# Altium PCB PCB1.PcbDoc
Units mil, origin at the board's own origin, x right, y up, seen from the top; angles counter-clockwise.
Board outline 3722.27 x 3722.27 mil, 2 copper layers (Top Layer, Bottom Layer); 10 components, 6 nets, 20 pads, 0 vias.
Unrouted connection lines stored in the file: 14.
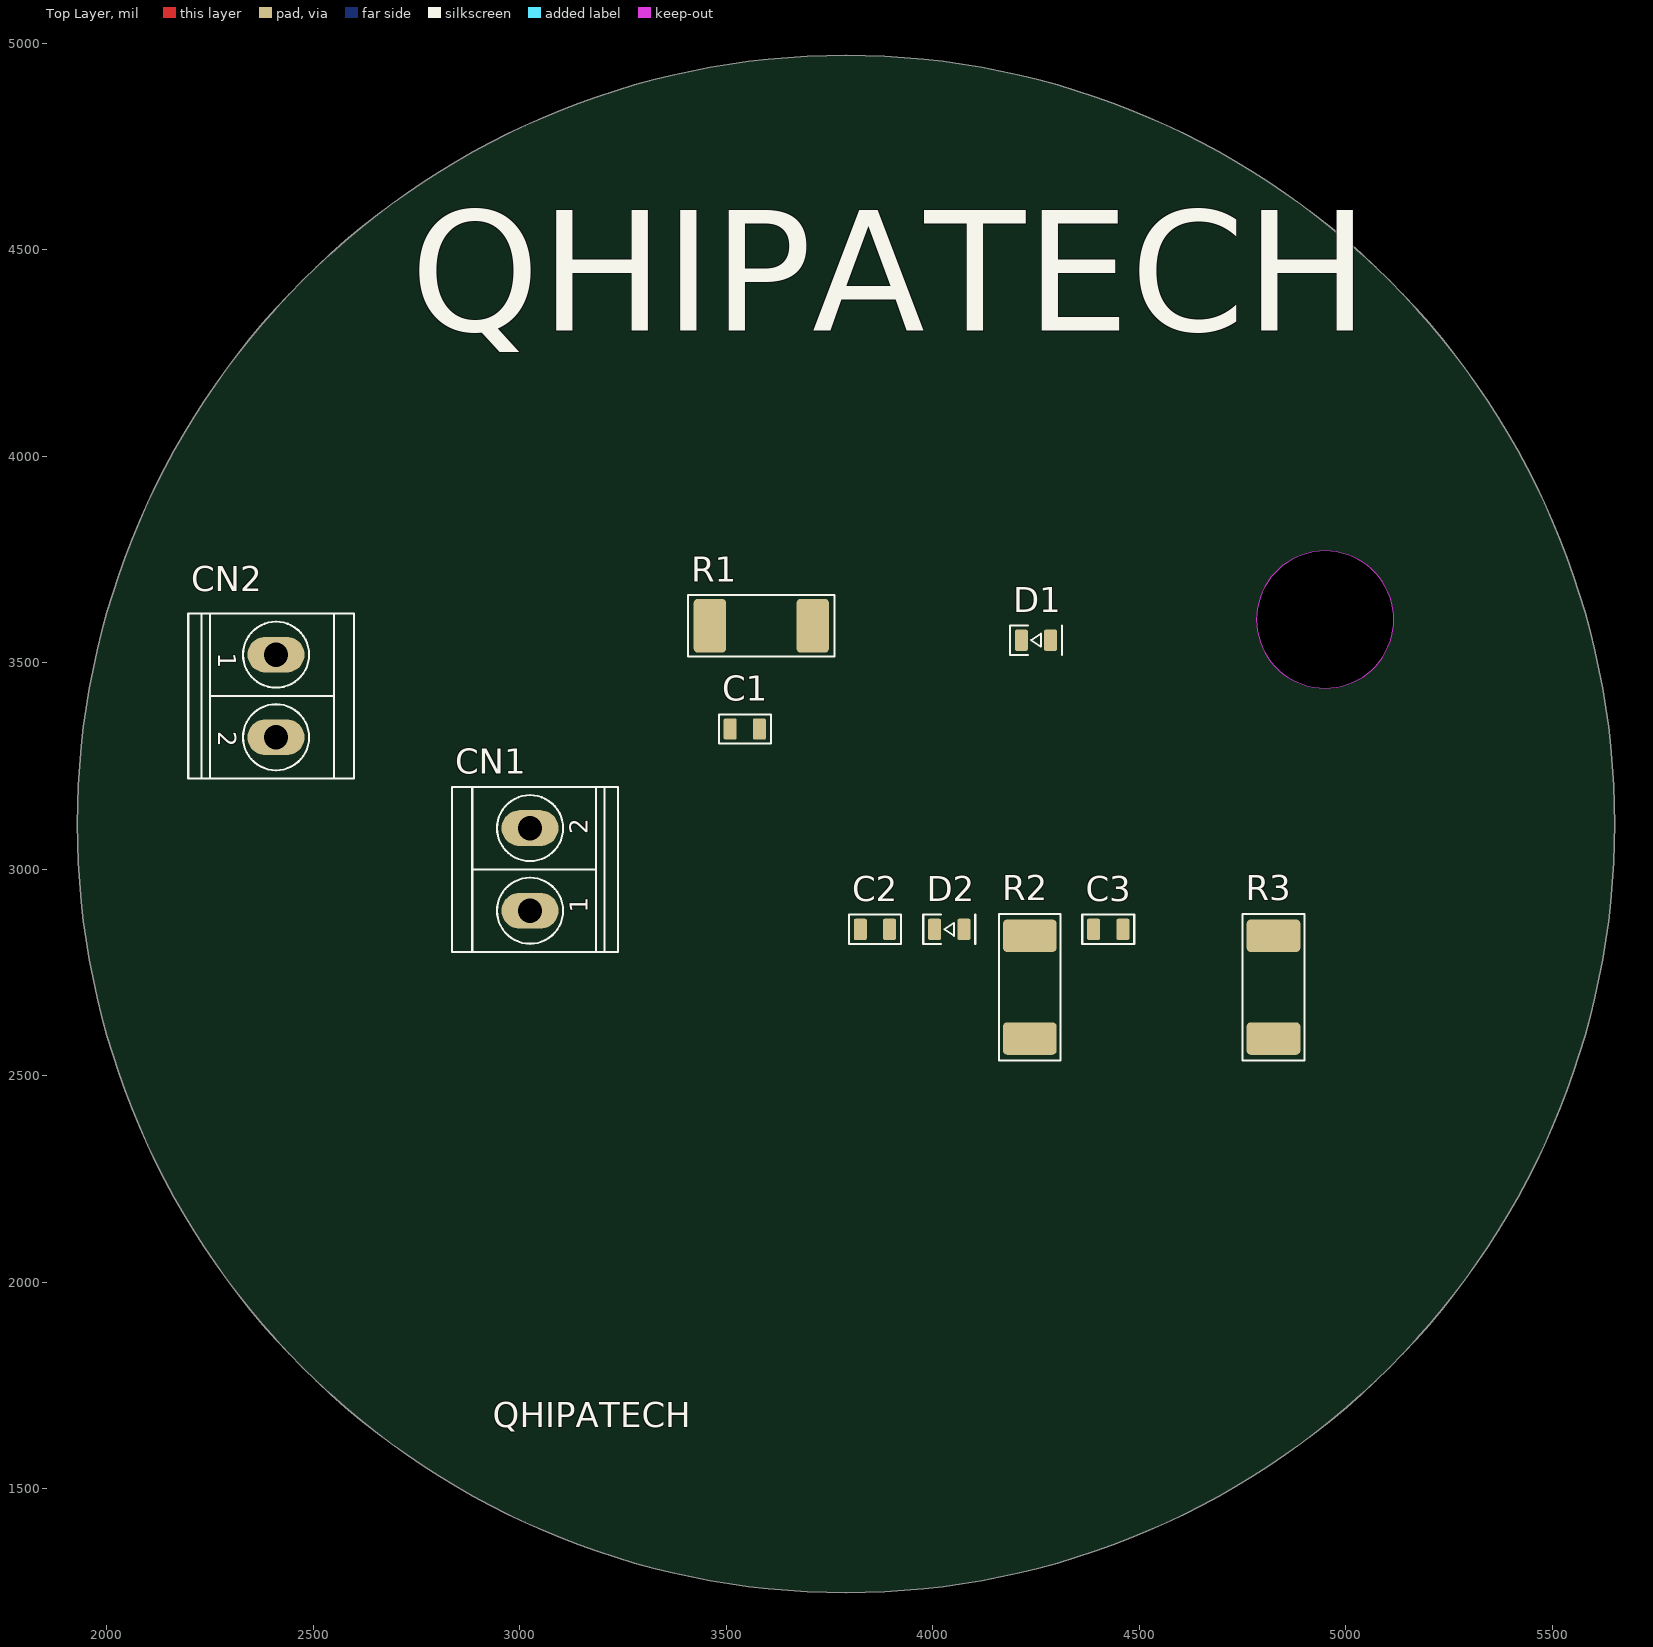
[diagram p0: Top Layer view]
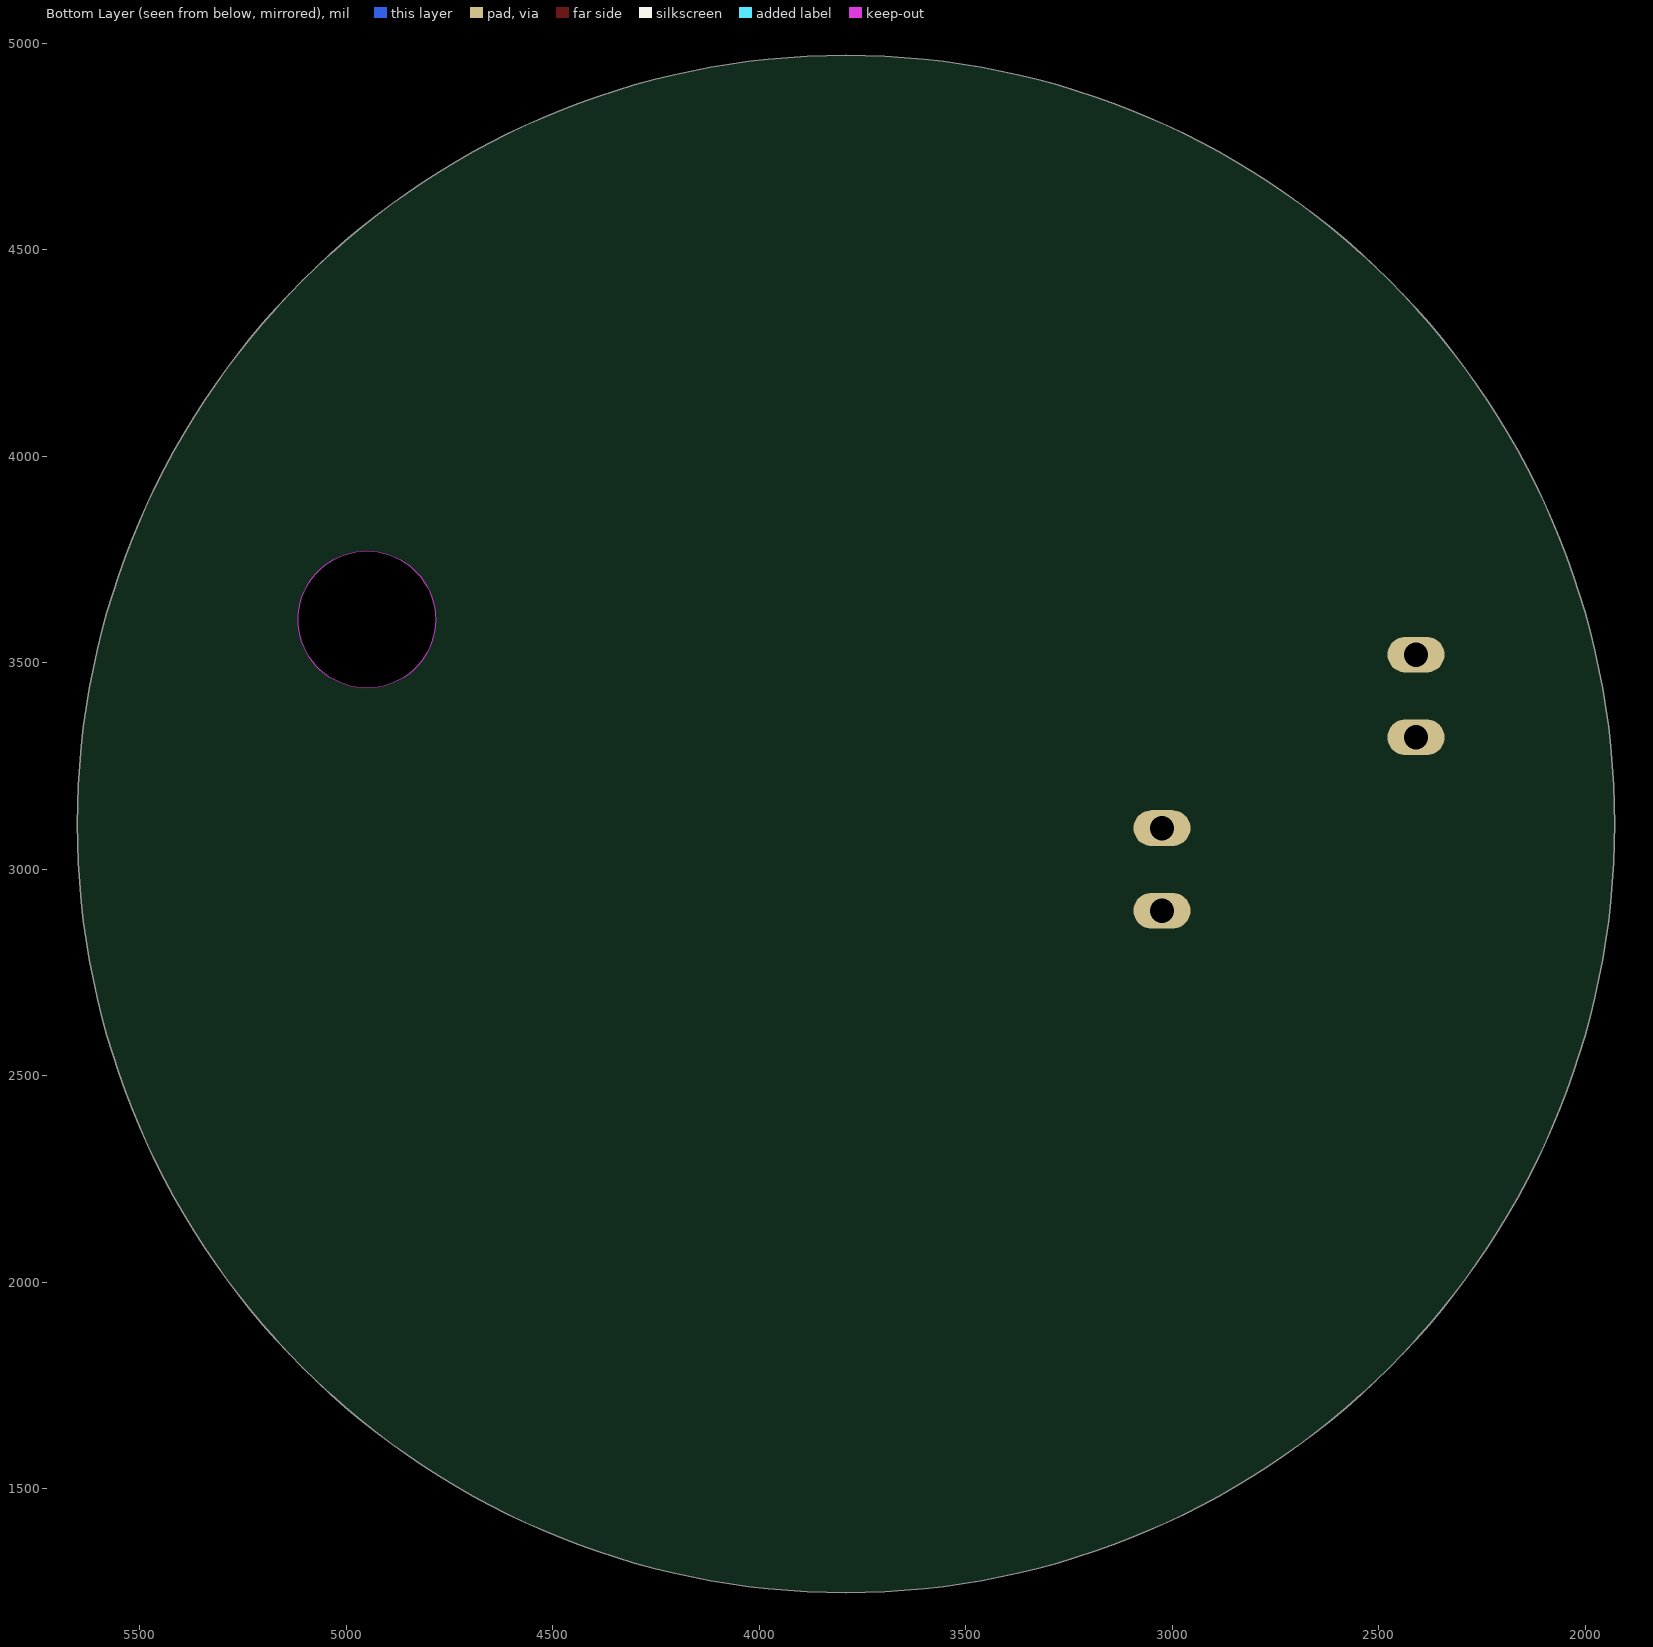
[diagram p1: Bottom Layer view, seen from below]

## Layer stack, top to bottom
Top Solder: solder mask 0.4, Solder Resist, Dk 3.5
Top Layer: signal copper 1.4
Dielectric 1: dielectric 12.6, FR-4, Dk 4.8
Bottom Layer: signal copper 1.4
Bottom Solder: solder mask 0.4, Solder Resist, Dk 3.5

## Board outline
1928.86,3110 ccw(c3790,3110) 3790,1248.86 ccw(c3790,3110) 5651.14,3110 ccw(c3790,3110) 3790,4971.14 ccw(c3790,3110)
cut-out: 4783.79,3605 ccw(c4950,3605) 4950,3438.79 ccw(c4950,3605) 5116.21,3605 ccw(c4950,3605) 4950,3771.21 ccw(c4950,3605)

## Design rules (kind name [scope] priority, off if disabled: settings)
Clearance [All] p1: gap=10 ignorepadtopadclearanceinfootprint=FALSE except(0: Arc-Hole Track-Hole SMDPad-Hole THPad-Hole Via-Hole Fill-Hole Poly-Hole Region-Hole Text-Hole)
PolygonConnect [All] p1: connectstyle=Relief reliefconductorwidth=10 reliefentries=4 polygonreliefangle="90 Angle" airgapwidth=10
RoutingVias [All] p1: holewidth=28 width=50 viastyle="Through Hole" minholewidth=28 minwidth=50 maxholewidth=28 maxwidth=50
SolderMaskExpansion [All] p1: expansion=4 istentingtop=FALSE
Width [All] p1: maxlimit=10 minlimit=10 preferedwidth=10
30 further rules are at their usual default settings.

## Components (designator, comment, footprint, x,y, rotation, side; value= is the part's Value field where it differs from the comment)
C1 "100nF" C0805 3545,3340 r180 top
C2 "100nF" C0805 3860,2855 r0 top
C3 "100nF" C0805 4425,2855 r0 top
CN1 "TB508-02" TB508-02 3025,3000 r90 top
CN2 "TB508-02" TB508-02 2410,3420 r270 top
D1 "LED" LED-0805 4250,3555 r0 top
D2 "LED" LED-0805 4040,2855 r0 top
R1 "1k0" R2512 3585,3590 r0 top
R2 "1k0" R2512 4235,2715 r90 top
R3 "1k0" R2512 4825,2715 r90 top

## Footprints (in the part's own frame and the unit in brackets; to place one, negate y for a bottom-side part, rotate by r counter-clockwise, add the part's x,y. Pads: shape width x height; smd on the part's side, far side on the other; paste and mask are expansions set on the pad)
C0805 [mm] "Ceramic capacitor 0805"
  rrect25% 0.8x1.3 smd: 1(-0.9,0) 2(0.9,0)
  silkscreen extent -1.6,-0.9 1.6,0.9, body extent -1,-0.62 1,0.63, height 0.8
LED-0805 [mm] "SMT LED DIODE 0805"
  rrect25% 0.8x1.3 smd: 1(-0.9,0) 2(0.9,0)
  silkscreen extent -1.6,-0.9 1.6,0.9, body extent -1.01,-0.62 1.01,0.63, height 1.1
R2512 [mm] "SMD RESISTOR 2512"
  rrect25% 2x3.3 smd: 1(-3.159,0) 2(3.16,0)
  silkscreen extent -4.5,-1.9 4.5,1.9, body extent -3.16,-1.6 3.16,1.6, height 0.62
TB508-02 [mm] "Vertical terminal block 0.2 inch (5.08mm) pitch"
  oval 2.2x3.5 hole 1.5: 1(-2.54,0) 2(2.54,0)
  silkscreen extent -5.08,-5.4 5.08,4.8, body extent -5.67,-4.75 5.06,4.75, height 15

## Part data
C1 C2 C3: library part Capacitor, "Capacitor without polarity", Voltage=25V
CN1 CN2: library part TB-02, "Terminal Block"
D1 D2: "LED - Light-Emitting Diode"
R1 R2 R3: library part Resistor, "Single resistor", Power=0.125W, Unit price=0.1

## Nets (pads, with @x,y where several pads share a name; then routed paths per layer and width w, separated by ;. In a path a pad name is that pad's centre, name@x,y a point inside that pad or via, vN(x,y) a via of type N, cw(c..) or ccw(c..) an arc to the next point about the centre after c; other vN are vias at no path point)
GND: C2.1 CN1.2 D1.1 D2.1 R2.1
NetC1_1: C1.1 C2.2 R3.1
NetC3_2: C3.2 R1.2 R3.2
PIN1: CN2.1 R1.1
PIN2: C1.2 CN2.2
VCC: C3.1 CN1.1 D1.2 D2.2 R2.2

## Silkscreen, mask and mechanical layers (free items; w line width, h text height)
Top Overlay:
  text "QHIPATECH" at 2735,4208.8 h500
  text "QHIPATECH" at 2935,1650 h60
Mechanical 1:
  circle w10: c4950,3605 r166.21
  circle w10: c3790,3110 r1861.14

## Text inside footprints (layer, text, board x,y; h text height)
CN1: Top Overlay "1" at 3165,2895 h43.31 r90; Top Overlay "2" at 3165,3085 h43.31 r90
CN2: Top Overlay "1" at 2270,3525 h43.31 r270; Top Overlay "2" at 2270,3335 h43.31 r270